# Altium PCB PCB1.PcbDoc
Units mil, origin at the board's own origin, x right, y up, seen from the top; angles counter-clockwise.
Board outline 1181.1 x 1691.13 mil, 2 copper layers (Top Layer, Bottom Layer); 40 components, 56 nets, 197 pads, 47 vias.
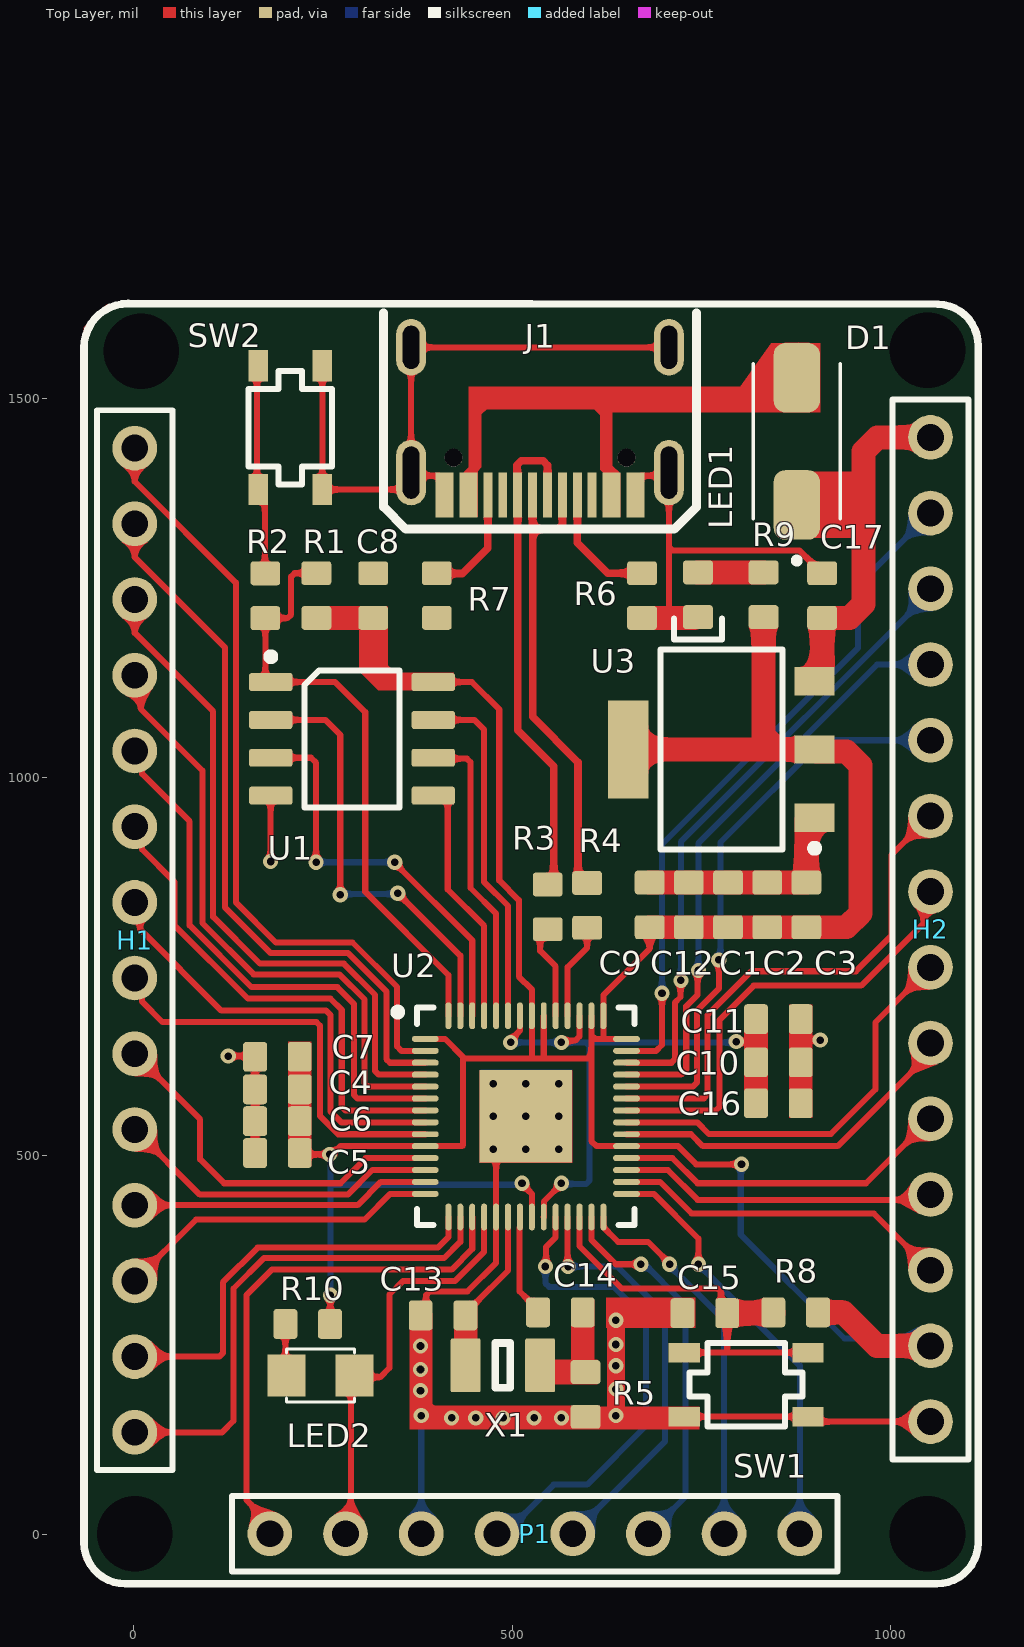
[diagram p0: Top Layer view]
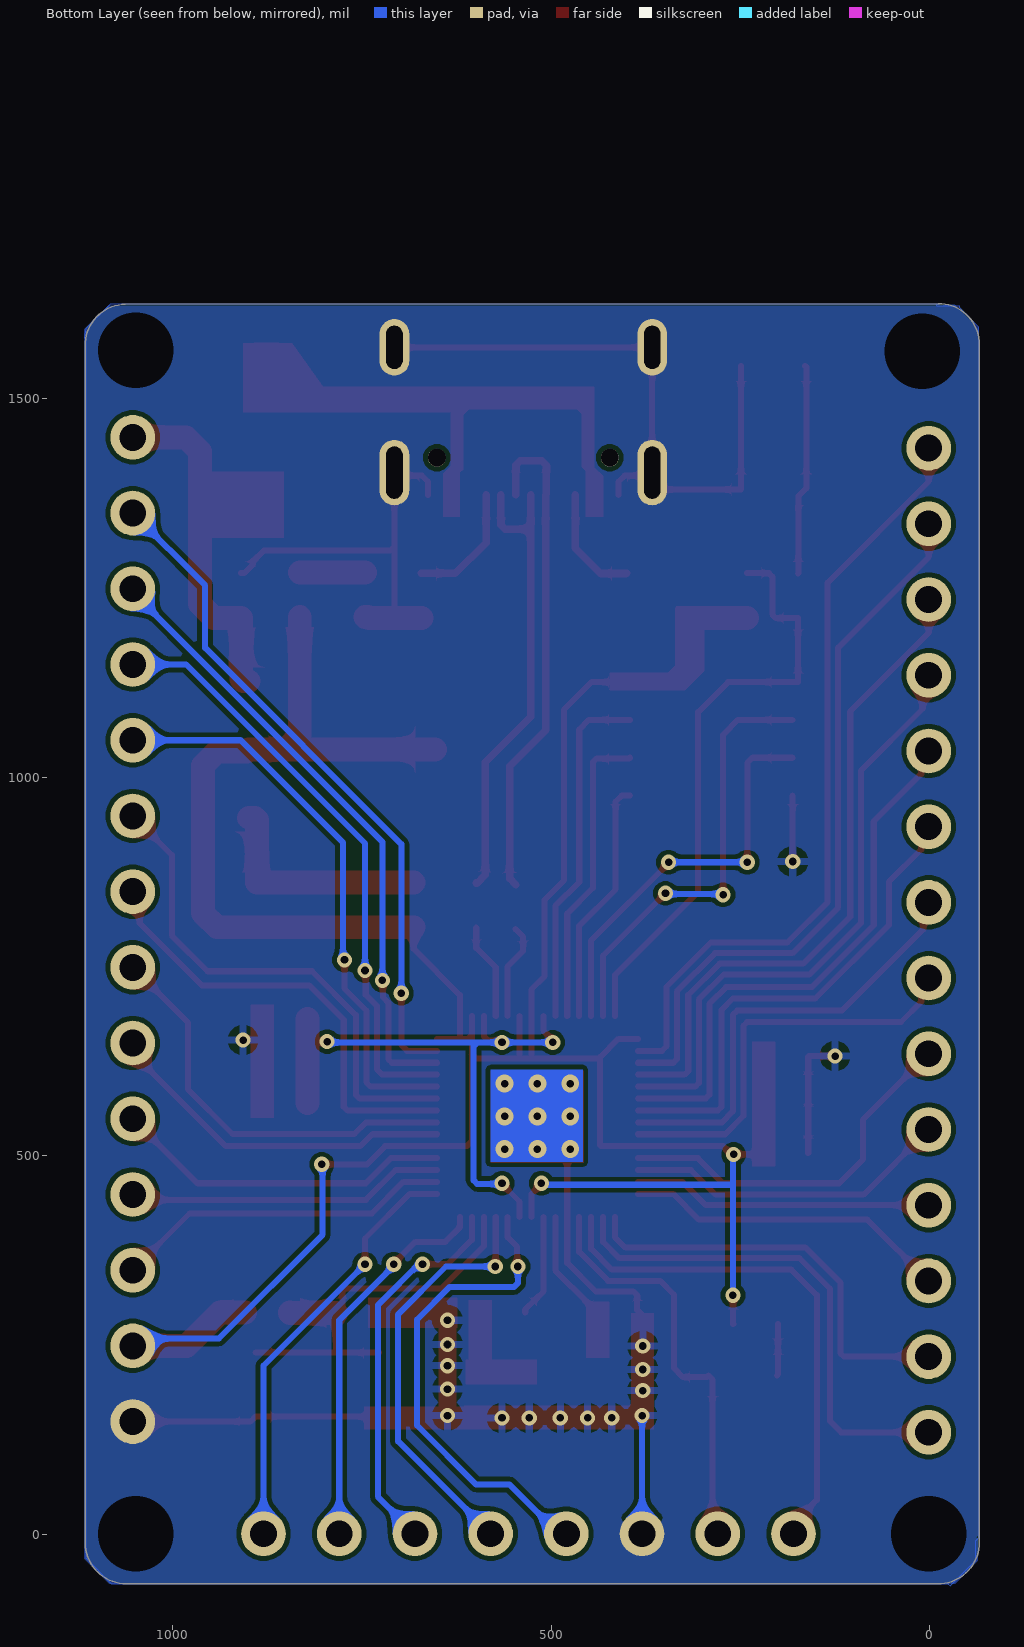
[diagram p1: Bottom Layer view, seen from below]
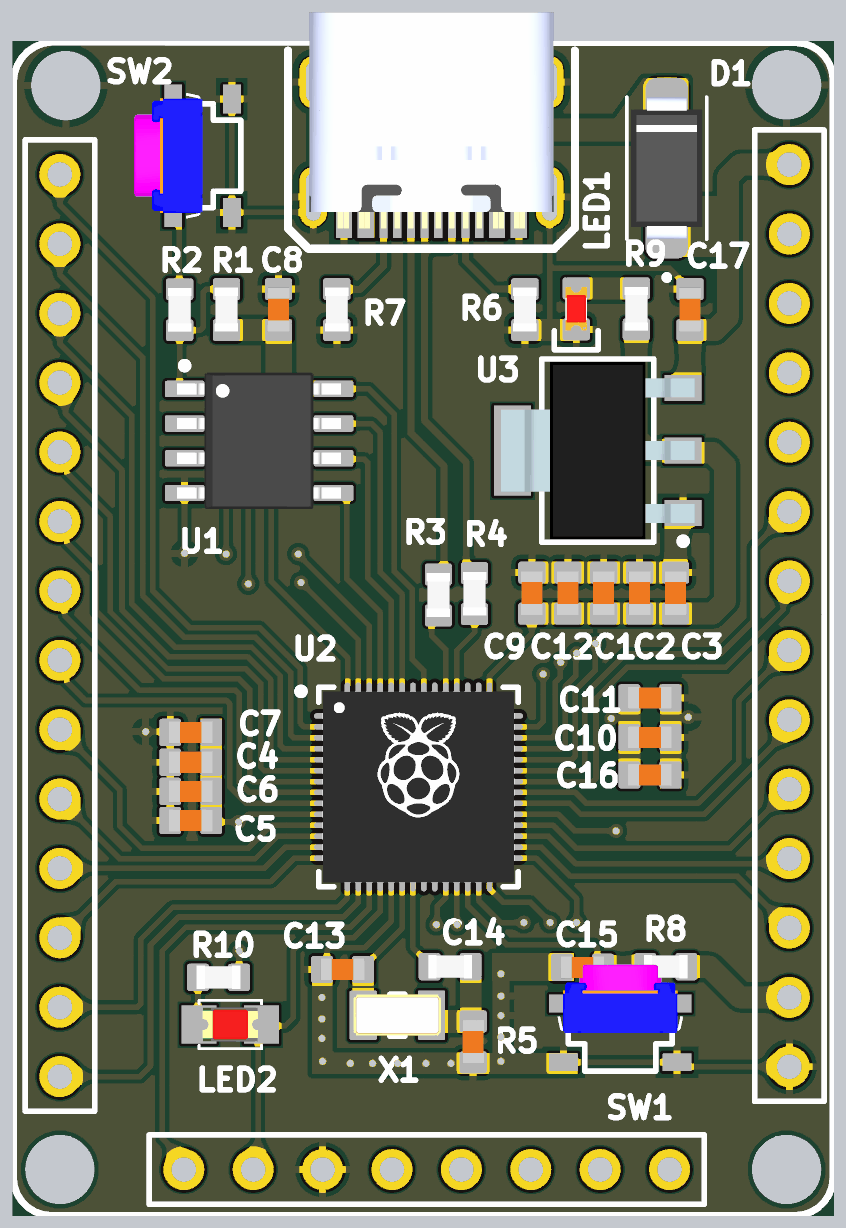
[diagram p2: 3D render of the assembled board from above, using the file's embedded part models]

## Layer stack, top to bottom
Top Solder: solder mask 0.4, Solder Resist, Dk 3.5
Top Layer: signal copper 1.4
Dielectric 1: dielectric 12.6, FR-4, Dk 4.8
Bottom Layer: signal copper 1.4
Bottom Solder: solder mask 0.4, Solder Resist, Dk 3.5

## Board outline
-65.49,-10.5 -65.49,1571.99 cw(c-11.49,1571.99) -11.49,1625.99 1062.52,1624.98 cw(c1061.57,1570.94) 1115.61,1569.99 1115.55,-11.09 cw(c1061.08,-10.67) 1061.07,-65.14 -10.86,-65.14 cw(c-10.86,-10.5)

## Design rules (kind name [scope] priority, off if disabled: settings)
Clearance [All] p1: gap=6 ignorepadtopadclearanceinfootprint=FALSE
DiffPairsRouting USB [InDifferentialPair('No Differential Pair')] p1: maxlimit=10 minlimit=10 mostfreqgap=10 toplayer_minwidth=15 toplayer_maxwidth=15 toplayer_prefwidth=15 bottomlayer_minwidth=15 bottomlayer_maxwidth=15 bottomlayer_prefwidth=15 maxuncoupledlength=500
PolygonConnect PolygonConnect_8 [All vs IsNamedPolygon('GND_L02_P005')] p1: thpad.connectstyle=Direct thpad.reliefconductorwidth=10 thpad.reliefentries=4 thpad.polygonreliefangle="90 Angle" thpad.airgapwidth=10 smdpad.connectstyle=Relief smdpad.reliefconductorwidth=10 smdpad.reliefentries=4 smdpad.polygonreliefangle="90 Angle" smdpad.airgapwidth=10 via.connectstyle=Relief via.reliefconductorwidth=10 via.reliefentries=4 via.polygonreliefangle="90 Angle" via.airgapwidth=10
PolygonConnect PolygonConnect_7 [All vs IsNamedPolygon('GND_L02_P005')] p2: connectstyle=Direct reliefconductorwidth=10 reliefentries=4 polygonreliefangle="90 Angle" airgapwidth=10
PolygonConnect PolygonConnect_6 [All vs IsNamedPolygon('GND_L02_P005')] p3: thpad.connectstyle=Direct thpad.reliefconductorwidth=10 thpad.reliefentries=4 thpad.polygonreliefangle="90 Angle" thpad.airgapwidth=10 smdpad.connectstyle=Direct smdpad.reliefconductorwidth=10 smdpad.reliefentries=4 smdpad.polygonreliefangle="90 Angle" smdpad.airgapwidth=10 via.connectstyle=Relief via.reliefconductorwidth=10 via.reliefentries=4 via.polygonreliefangle="90 Angle" via.airgapwidth=10
PolygonConnect PolygonConnect_5 [All vs IsNamedPolygon('GND_L02_P003')] p4: thpad.connectstyle=Direct thpad.reliefconductorwidth=10 thpad.reliefentries=4 thpad.polygonreliefangle="90 Angle" thpad.airgapwidth=10 smdpad.connectstyle=Direct smdpad.reliefconductorwidth=10 smdpad.reliefentries=4 smdpad.polygonreliefangle="90 Angle" smdpad.airgapwidth=10 via.connectstyle=Relief via.reliefconductorwidth=10 via.reliefentries=4 via.polygonreliefangle="90 Angle" via.airgapwidth=10
PolygonConnect PolygonConnect_4 [All vs IsNamedPolygon('GND_L01_P004')] p5: thpad.connectstyle=Direct thpad.reliefconductorwidth=10 thpad.reliefentries=4 thpad.polygonreliefangle="90 Angle" thpad.airgapwidth=10 smdpad.connectstyle=Direct smdpad.reliefconductorwidth=10 smdpad.reliefentries=4 smdpad.polygonreliefangle="90 Angle" smdpad.airgapwidth=10 via.connectstyle=Relief via.reliefconductorwidth=10 via.reliefentries=4 via.polygonreliefangle="90 Angle" via.airgapwidth=10
PolygonConnect PolygonConnect_3 [All vs IsNamedPolygon('GND_L01_P002')] p6: thpad.connectstyle=Direct thpad.reliefconductorwidth=10 thpad.reliefentries=4 thpad.polygonreliefangle="90 Angle" thpad.airgapwidth=10 smdpad.connectstyle=Direct smdpad.reliefconductorwidth=10 smdpad.reliefentries=4 smdpad.polygonreliefangle="90 Angle" smdpad.airgapwidth=10 via.connectstyle=Relief via.reliefconductorwidth=10 via.reliefentries=4 via.polygonreliefangle="90 Angle" via.airgapwidth=10
PolygonConnect PolygonConnect_2 [All vs IsNamedPolygon('GND_L01_P002')] p7: thpad.connectstyle=Direct thpad.reliefconductorwidth=10 thpad.reliefentries=4 thpad.polygonreliefangle="90 Angle" thpad.airgapwidth=10 smdpad.connectstyle=Direct smdpad.reliefconductorwidth=10 smdpad.reliefentries=4 smdpad.polygonreliefangle="90 Angle" smdpad.airgapwidth=10 via.connectstyle=Relief via.reliefconductorwidth=10 via.reliefentries=4 via.polygonreliefangle="90 Angle" via.airgapwidth=10
PolygonConnect PolygonConnect_1 [All vs IsNamedPolygon('NONET_L01_P000')] p8: thpad.connectstyle=Direct thpad.reliefconductorwidth=10 thpad.reliefentries=4 thpad.polygonreliefangle="90 Angle" thpad.airgapwidth=10 smdpad.connectstyle=Direct smdpad.reliefconductorwidth=10 smdpad.reliefentries=4 smdpad.polygonreliefangle="90 Angle" smdpad.airgapwidth=10 via.connectstyle=Relief via.reliefconductorwidth=10 via.reliefentries=4 via.polygonreliefangle="90 Angle" via.airgapwidth=10
PolygonConnect [All] p9: connectstyle=Relief reliefconductorwidth=10 reliefentries=4 polygonreliefangle="90 Angle" airgapwidth=10
RoutingVias [All] p1: holewidth=28 width=50 viastyle="Through Hole" minholewidth=28 minwidth=50 maxholewidth=28 maxwidth=50
SolderMaskExpansion [All] p1: expansion=4 istentingtop=FALSE
Width [All] p1: maxlimit=39.37 minlimit=8 preferedwidth=8 bottomlayer_maxwidth=10 minimp=50.000000 maximp=50.000000 favimp=50.000000
29 further rules are at their usual default settings.

## Classes and differential pairs
net class USB: USB_D+ USB_D-

## Components (designator, comment, footprint, x,y, rotation, side; value= is the part's Value field where it differs from the comment)
C1 "C0603" CAP_0603 785.14,831.68 r90 top
C2 "C0603" CAP_0603 836.89,831.68 r90 top
C3 "C0603" CAP_0603 888.64,831.68 r90 top
C4 "C0603" CAP_0603 190,588 r180 top
C5 "C0603" CAP_0603 190,504 r180 top
C6 "C0603" CAP_0603 190,546 r180 top
C7 "C0603" CAP_0603 190,631 r180 top
C8 "C0603" CAP_0603 316.51,1240.27 r270 top
C9 "C0603" CAP_0603 851.64,680.74 r0 top
C10 "C0603" CAP_0603 851.64,569.74 r180 top
C11 "C0603" CAP_0603 851.64,623.74 r180 top
C12 "C0603" CAP_0603 681.64,831.68 r90 top
C13 "C0603" CAP_0603 408.79,289.43 r0 top
C14 "C0603" CAP_0603 597,185 r90 top
C15 "C0603" CAP_0603 754.57,292.43 r0 top
C16 "C0603" CAP_0603 909.51,1240.27 r270 top
C17 "C0603" CAP_0603 733.39,831.68 r270 top
D1 "B340A-13" B340A 876,1444 r90 top
H1 "HDR 1X14" "HDR 1X14" 1.44,135.98 r90 top
H2 "HDR 1X14" "HDR 1X14" 1052.62,1448.16 r270 top
J1 "TYPE-C-31-M-12" TYPE-C-31-M-12 536.87,1485.38 r180 top
LED1 "RED" LED_0603_RED 745.54,1241.28 r90 top
LED2 "LED_0805_RED" LED-0805-Red 202,210 r0 top
P1 "Header 8" HDR1X8 880,1 r180 top
R1 "R0603" RES_0603 241.51,1240.27 r90 top
R2 "R0603" RES_0603 174,1240 r90 top
R3 "R0603" RES_0603 547,829 r90 top
R4 "R0603" RES_0603 599,831 r90 top
R5 "R0603" RES_0603 563.79,293.43 r180 top
R6 "R0603" RES_0603 671.51,1240.27 r270 top
R7 "R0603" RES_0603 400.51,1240.27 r270 top
R8 "R0603" RES_0603 874.57,293.43 r0 top
R9 "R0603" RES_0603 832.15,1241.28 r90 top
R10 "R0603" RES_0603 230,278 r0 top
SW1 "SKRPANE010" SKRPANE010 809,198 r0 top
SW2 "SKRPANE010" SKRPANE010 207,1462 r90 top
U1 "W25Q128JVSIM" SOIC-8 288.51,1050.99 r0 top
U2 "RP2040" QFN-56-EP 518.17,552.31 r0 top
U3 "AMS1117" "SOT223 - 3 LEAD" 776.51,1036.99 r180 top
X1 "XTAL_3215" XTAL_3215-2 487.79,223.43 r180 top

## Footprints (in the part's own frame and the unit in brackets; to place one, negate y for a bottom-side part, rotate by r counter-clockwise, add the part's x,y. Pads: shape width x height; smd on the part's side, far side on the other; paste and mask are expansions set on the pad)
B340A [mm]
  rrect50% 2.33x1.55 smd: A(2.135,0) C(-2.135,0)
  silkscreen extent -4.1,-1.46 2.6,1.46, body extent -2.6,-1.3 2.6,1.3, height 2.4
CAP_0603 [mm]
  rrect25% 0.8x1 smd: 1(-0.75,0) 2(0.75,0)
  body extent -0.8,-0.4 0.8,0.4, height 0.51
HDR1X8 [mm] "Connector; Header; 8 Position"
  round 1.5 hole 0.9: 1(0,0) 2(2.54,0) 3(5.08,0) 4(7.62,0) 5(10.16,0) 6(12.7,0) 7(15.24,0) 8(17.78,0)
  silkscreen extent -1.27,-1.27 19.05,1.27
"HDR 1X14" [mm]
  round 1.5 hole 0.9: 1(-0.025,0) 2(2.515,0) 3(5.055,0) 4(7.595,0) 5(10.135,0) 6(12.675,0) 7(15.215,0) 8(17.755,0) 9(20.295,0) 10(22.835,0) 11(25.375,0) 12(27.915,0) 13(30.455,0) 14(32.995,0)
  silkscreen extent -1.3,-1.27 34.26,1.27
LED-0805-Red [mil]
  rect 50x55 smd: 1(0,0) 2(90,0)
  silkscreen extent 0,-35 90,35, body extent 5,-25 85,25, height 43
LED_0603_RED [mm]
  rrect25% 0.8x1 smd: A(0.75,0) K(-0.75,0)
  silkscreen extent -1.5,-0.8 -0.8,0.8, body extent -0.8,-0.4 0.8,0.4, height 0.6
QFN-56-EP [mm]
  oval 0.9x0.2 smd mask+0.15: 1(-3.375,2.6) 2(-3.375,2.2) 3(-3.375,1.8) 4(-3.375,1.4) 5(-3.375,1) 6(-3.375,0.6) 7(-3.375,0.2) 8(-3.375,-0.2) 9(-3.375,-0.6) 10(-3.375,-1) 11(-3.375,-1.4) 12(-3.375,-1.8) 13(-3.375,-2.2) 14(-3.375,-2.6) 29(3.375,-2.6) 30(3.375,-2.2) 31(3.375,-1.8) 32(3.375,-1.4) 33(3.375,-1) 34(3.375,-0.6) 35(3.375,-0.2) 36(3.375,0.2) 37(3.375,0.6) 38(3.375,1) 39(3.375,1.4) 40(3.375,1.8) 41(3.375,2.2) 42(3.375,2.6)
  oval 0.2x0.9 smd mask+0.15: 15(-2.6,-3.375) 16(-2.2,-3.375) 17(-1.8,-3.375) 18(-1.4,-3.375) 19(-1,-3.375) 20(-0.6,-3.375) 21(-0.2,-3.375) 22(0.2,-3.375) 23(0.6,-3.375) 24(1,-3.375) 25(1.4,-3.375) 26(1.8,-3.375) 27(2.2,-3.375) 28(2.6,-3.375) 43(2.6,3.375) 44(2.2,3.375) 45(1.8,3.375) 46(1.4,3.375) 47(1,3.375) 48(0.6,3.375) 49(0.2,3.375) 50(-0.2,3.375) 51(-0.6,3.375) 52(-1,3.375) 53(-1.4,3.375) 54(-1.8,3.375) 55(-2.2,3.375) 56(-2.6,3.375)
  rect 3.1x3.1 smd: 57(0,0)
  silkscreen extent -4.42,-3.65 3.65,3.65, body extent -3.51,-3.51 3.51,3.51, height 1.01
RES_0603 [mm]
  rrect25% 0.8x1 smd: 1(-0.75,0) 2(0.75,0)
  body extent -0.8,-0.43 0.8,0.43, height 0.52
SKRPANE010 [mm]
  rect 1.05x0.65 smd: 12(-2.075,1.075) 12(2.075,1.075) 34(-2.075,-1.075) 34(2.075,-1.075)
  silkscreen extent -1.9,-1.4 1.9,1.4, body extent -2.3,-1.6 2.3,1.6, height 2.51
SOIC-8 [mm] "SOIC, 8-Leads, Body 4.91x3.90mm, Pitch 1.27mm, IPC Medium Density"
  rrect25% 1.45x0.6 smd: 1(-2.725,1.905) 2(-2.725,0.635) 3(-2.725,-0.635) 4(-2.725,-1.905) 5(2.725,-1.905) 6(2.725,-0.635) 7(2.725,0.635) 8(2.725,1.905)
  silkscreen extent -2.85,-2.3 1.6,2.88, body extent -3,-2.5 3,2.5, height 1.75
"SOT223 - 3 LEAD" [mm] "SOT223, 4-Leads, Body 6.7x6.7mm (max), Pitch 2.29mm, IPC Medium Density"
  rect 1.35x0.95 smd: 1(-3.125,2.29) 2(-3.125,0) 3(-3.125,-2.29)
  rect 1.35x3.3 smd: 4(3.125,0)
  silkscreen extent -3.25,-3.35 2.05,3.44, body extent -3.54,-3.25 3.54,3.25, height 1.65
TYPE-C-31-M-12 [mm]
  rect 0.6x1.5 smd mask+0.07: A1B12(-3.2,2.85) B1A12(3.2,2.85)
  rect 0.6x1.5 smd mask+0.14: A4B9(-2.4,2.85) B4A9(2.4,2.85)
  rect 0.3x1.5 smd mask+0.14: A5(-1.25,2.85) A6(-0.25,2.85) A7(0.25,2.85) A8(1.25,2.85) B5(1.75,2.85) B6(0.75,2.85) B7(-0.75,2.85) B8(-1.75,2.85)
  round 0.6 hole 0.6 unplated mask+0.3: MH(-2.9,1.6) MH(2.9,1.6)
  oval 1x1.9 hole 0.55 slot 1.45 at 90 deg mask+0.05: SH(-4.325,-2.1) SH(4.325,-2.1)
  oval 1x2.2 hole 0.55 slot 1.75 at 90 deg mask+0.05: SH(-4.325,2.1) SH(4.325,2.1)
  silkscreen extent -5.25,-3.25 5.25,4, body extent -4.47,-4.65 4.47,3.25, height 3.32
XTAL_3215-2 [mm]
  rrect10% 1x1.8 smd: 1(-1.25,0) 2(1.25,0)
  silkscreen extent -0.25,-0.75 0.25,0.75, body extent -1.6,-0.75 1.6,0.75, height 0.91

## Part data
C1 C2 C3 C4 C5 C6 C7 C8 C9 C10 C11 C12 C13 C14 C15 C16 C17: library part CAP_0603, "Capacitor SMD 0603"
D1: "Diode Schottky 40 V 3A Surface Mount SMA", Package="DO-214 Diodes Inc.", Availability="In Stock", Check_prices=https://www.snapeda.com/parts/B340A-13/Diodes+Inc./view-part/?ref=eda, MF="Diodes Inc.", MP=B340A-13, Price=None, Purchase-URL=https://pricing.snapeda.com/search/part/B340A-13/?ref=eda, SnapEDA_Link=https://www.snapeda.com/parts/B340A-13/Diodes+Inc./view-part/?ref=snap
J1: "USB Type C Connector Horizontal SMT", Manufacturer="Koren Hroparts", Manufacturer Part Number=TYPE-C-31-M-12
LED1: library part LED_0603_RED, "LED 0603 RED SMD"
R1 R2 R3 R4 R5 R6 R7 R8 R9 R10: library part RES_0603, "Resistor SMD 0603"
SW1 SW2: "Tactile Switch SMD SPST", Manufacturer="Alps Alpine", Manufacturer Part Number=SKRPANE010
U1: "128M-BIT / SERIAL FLASH MEMORY WITH / DUAL/QUAD SPI & QPI & DTR SOIC-8", Manufacturer=Winbond, Manufacturer Part Number=W25Q128JVSIM
U2: "32-Bit Dual-Core ARM Cortex-M0+ Microcontroller", Manufacturer="Raspberry Pi", Manufacturer Part Number=RP2040
X1: "Crystal SMD 3215"
P1: LatestRevisionDate=17-Jul-2002, LatestRevisionNote="Re-released for DXP Platform.", Publisher="Altium Limited"

## Free pads (board coordinates)
  round 60 hole 100 unplated: 1(1.44,1.13) 1(10,1563) 1(1048.69,1.13) 1(1048.69,1564.12)

## Via types
v1: diameter 20, hole 10, Top Layer to Bottom Layer, tented both sides, 38 vias
v2: diameter 23.62, hole 9.84, Top Layer to Bottom Layer, 9 vias

## Nets (pads, with @x,y where several pads share a name; then routed paths per layer and width w, separated by ;. In a path a pad name is that pad's centre, name@x,y a point inside that pad or via, vN(x,y) a via of type N, cw(c..) or ccw(c..) an arc to the next point about the centre after c; other vN are vias at no path point)
+1V1: C9.1 C10.2 C11.2 U2.23 U2.45 U2.50 | length 806.6
  Top Layer w8: v1(498,650) 498,653.25 510.24,665.48 510.24,685.12 U2.50 ; U2.23 541.86,419.5 541.86,439.86 v1@565,463 ; v1(565,650) 567.3,652.3 583.3,652.3 588.98,657.98 588.98,685.12 U2.45 ; v1(796,651) 820.87,651 822.11,652.24
  Top Layer w31.5: C10.2 C11.2 822.11,652.24 C9.1
  Bottom Layer w8: v1(498,650) v1(565,650) ; v1@565,463 597.76,463 602.44,467.69 602.44,644.81 597.76,649.49 ; v1@565.52,649.91 794.91,649.91 v1(796,651)
  other v1: 565,463.95
+3V3: C1.1 C2.1 C3.1 C4.1 C5.1 C6.1 C7.1 C8.2 C12.1 C17.2 H2.13 R1.1 R8.2 R9.1 R10.2 U1.8 U2.1 U2.10 U2.22 U2.33 U2.42 U2.43 U2.44 U2.48 U2.49 U3.2 U3.4 | length 3954.7
  Top Layer w8: C5.1 221.53,502 v1(259,502) 262.25,502 273.18,512.94 U2.10 433.94,512.94 435.33,514.33 435.33,629.67 ; R10.2 259.76,278.24 259.76,315.76 v1(260,316) ; U2.1 411.33,654.67 435.33,630.67 435.33,629.67 ; U1.8 447.01,1125.99 483,1090 483,864 509,838 509,737 526.05,719.95 U2.49 526.05,630 ; v1@513.5,462.5 526.05,449.95 U2.22 ; 541.8,630 U2.48 ; U2.44 604.79,659.43 ; U2.42 621,654.67 ; C12.1 681.64,773.64 620.54,712.54 U2.43 620.54,655.13 621,654.67 ; v1(803,489) 743.23,489 719.29,512.94 U2.33 611.54,512.94 604.79,519.69 604.79,633.69 ; 435.33,629.67 436,629 600.1,629 604.79,633.69 ; 604.79,633.69 604.79,659.43 ; 604.79,659.43 609.55,654.67 621,654.67
  Top Layer w31.5: R1.1 C8.2 ; U3.4 850.6,1036.99 ; C12.1 C17.2 C1.1 C2.1 C3.1 941.55,802.15 960,820.6 960,1015.59 941.55,1034.04 902.5,1034.04 U3.2 850.6,1036.99 ; R9.1 832.15,1055.44 850.6,1036.99 ; R8.2 937.57,293.43 981.84,249.16 H2.13
  Bottom Layer w8: v1(259,502) 260,501 260,462.05 ; v1(260,316) 260,462.05 ; v1(513.05,463.95) 511.09,462 260.05,462 260,462.05 ; v1(803,489) 802,488 802,396 939.07,258.93 1042.85,258.93 H2.13
ADC0: H2.5 U2.38 | length 758.6
  Top Layer w8: U2.38 738.68,591.68 744,597 744,692 773,721 v1(773,759)
  Bottom Layer w8: v1(773,759) 775.29,761.29 775.29,914.29 910.16,1049.16 H2.5
ADC1: H2.4 U2.39 | length 791.7
  Top Layer w8: U2.39 723.31,607.43 730,614.11 730,697.8 745,712.8 745,744 v1(746,745)
  Bottom Layer w8: v1(746,745) 746,913 982.16,1149.16 H2.4
ADC2: H2.3 U2.40 | length 827
  Top Layer w8: U2.40 710.31,623.17 715.05,627.91 715.05,702.64 722.4,710 722.4,731.4 v1(723,732)
  Bottom Layer w8: v1(723,732) 723,915 1052.62,1244.62 H2.3
ADC3: H2.2 U2.41 | length 899.6
  Top Layer w8: U2.41 690.31,638.92 698,646.61 v1(698,715)
  Bottom Layer w8: v1(698,715) 698,912 957.13,1171.13 957.13,1253.67 H2.2
GND: C1.2 C2.2 C3.2 C4.2 C5.2 C6.2 C7.2 C8.1 C9.2 C10.1 C11.1 C12.2 C13.1 C14.1 C15.1 C16.1 C17.1 H2.14 J1.A1B12 J1.B1A12 J1.SH LED1.K P1.6 pad.1 R6.2 R7.2 SW1.34 SW2.34 U1.4 U2.19 U2.57 U3.1 | length 2770.9
  Top Layer w8: v1(125,632) 159.47,632 C7.2 C4.2 C6.2 C5.2 ; v1(181,889) 181,975.76 U1.4 ; SW2.34@249.32,1543.69 249.32,1380.31 352.11,1380.31 366.6,1394.8 J1.SH@366.6,1402.7 ; C13.1 386.47,296.63 386.47,316.31 391.15,321 441,321 478.8,358.8 U2.19 478.8,505.06 v2(474.87,509) ; J1.B1A12 410.89,1390.89 403.08,1398.7 370.6,1398.7 J1.SH@366.6,1402.7 ; J1.A1B12 662.86,1390.89 670.67,1398.7 703.15,1398.7 707.15,1402.7 707.15,1398.7 707.15,1304.69 ; J1.SH@707.15,1568.06 366.6,1568.06 J1.SH@366.6,1402.7 ; 709,1210.74 707.15,1212.59 707.15,1304.69 ; SW1.34@727.31,155.68 890.69,155.68 897.21,149.16 H2.14 ; 884,654 v1@907,654 ; C16.1 905.57,1269.8 893.83,1281.54 893.83,1285.48 879.31,1300 711.84,1300 707.15,1304.69
  Top Layer w31.5: R6.2 709,1210.74 740.58,1210.74 741.6,1211.76 LED1.K ; C12.2 C17.1 C1.2 C2.2 C3.2 888.64,943.8 891.67,946.83 U3.1
  Bottom Layer w8: P1.6 v1(380,157)
  other v1: 420,154 452,154 488,154 529,154 565,154 637,157 379,190 637,192 379,218 637,223 379,249 637,251 637,283 907,653
  other v2: 518.17,509 561.48,509 474.87,552.31 518.17,552.31 561.48,552.31 474.87,595.61 518.17,595.61 561.48,595.61
IO0: H1.14 U2.2 | length 1032.9
  Top Layer w8: H1.14 1.44,1390.88 135,1257.33 135,835 188,782 289.2,782 348,723.2 348,644.61 353.69,638.92 U2.2
IO1: H1.13 U2.3 | length 958.1
  Top Layer w8: H1.13 1.44,1290.88 121,1171.33 121,828 181,768 283.4,768 334,717.4 334,627.86 338.69,623.17 U2.3
IO2: H1.12 U2.4 | length 887.4
  Top Layer w8: H1.12 1.44,1190.88 105,1087.33 105,816 167,754 277.6,754 319,712.6 319,612.11 323.69,607.43 U2.4
IO3: H1.11 U2.5 | length 812.9
  Top Layer w8: H1.11 9.59,1126.83 9.59,1090.41 91,1009 91,807.6 158.6,740 271.8,740 305,706.8 305,596.36 309.69,591.68 U2.5
IO4: H1.10 U2.6 | length 736.9
  Top Layer w8: H1.10 11.21,1025.22 11.21,1004.79 74,942 74,804.8 155.8,723 269,723 291,701 291,580.62 295.69,575.93 U2.6
IO5: H1.9 U2.7 | length 659.5
  Top Layer w8: H1.9 11.21,925.22 11.21,904.79 54,862 54,805 151,708 260,708 275,693 275,564.87 279.69,560.18 U2.7
IO6: H1.8 U2.8 | length 595.6
  Top Layer w8: H1.8 8.59,827.83 8.59,799.41 116,692 254.31,692 260,686.31 260,558.8 274.37,544.43 U2.8
IO7: H1.7 U2.9 | length 551.8
  Top Layer w8: H1.7 11.21,725.22 11.21,703.79 38,677 241.31,677 246,672.31 246,553 270.32,528.69 U2.9
IO8: H1.6 U2.11 | length 499.4
  Top Layer w8: H1.6 88,548.42 88,495.57 119.57,464 273.28,464 306.47,497.19 U2.11
IO9: H1.5 U2.12 | length 432.9
  Top Layer w8: H1.5 87.44,448.98 282.98,448.98 315.44,481.44 U2.12
IO10: H1.4 U2.13 | length 396.6
  Top Layer w8: H1.4 295.98,434.98 326.69,465.69 U2.13
IO11: H1.3 U2.14 | length 431.5
  Top Layer w8: H1.3 82.46,416 305,416 338.94,449.94 U2.14
IO12: H1.2 U2.15 | length 561
  Top Layer w8: H1.2 113.31,234.98 118,239.67 118,333 164,379 402,379 415.81,392.81 U2.15
IO13: H1.1 U2.16 | length 669.7
  Top Layer w8: H1.1 116.98,134.98 132,150 132,325 172,365 410,365 431.56,386.56 U2.16
IO14: P1.8 U2.17 | length 693.9
  Top Layer w8: P1.8 180,14.82 149,45.82 149,316.31 182.69,350 420,350 447.31,377.31 U2.17
IO15: LED2.2 P1.7 U2.18 | length 557.3
  Top Layer w8: P1.7 287,8 287,205 LED2.2 294,208 326,208 338,220 338,317 356,335 424.8,335 463.06,373.26 U2.18
IO16: P1.3 U2.27 | length 514.5
  Top Layer w8: U2.27 604.79,389.21 637,357 v1(670,357)
  Bottom Layer w8: v1@670,362 729,303 729,50 P1.3
IO17: P1.2 U2.28 | length 501.9
  Top Layer w8: U2.28 620.54,405.78 639.81,386.51 679.49,386.51 v1@704.57,361.43
  Bottom Layer w8: v1(708,357) 708,355 780,283 P1.2
IO18: P1.1 U2.29 | length 556.9
  Top Layer w8: U2.29 687.06,449.94 746,391 v1@746,365
  Bottom Layer w8: v1(746,357) 880,223 P1.1
IO19: H2.12 U2.30 | length 449.8
  Top Layer w8: U2.30 695.31,465.69 737,424 977.78,424 H2.12
IO20: H2.11 U2.31 | length 420.9
  Top Layer w8: U2.31 705.56,481.44 745,442 1045.46,442 H2.11
IO21: H2.10 U2.32 | length 450.6
  Top Layer w8: U2.32 711.81,497.19 745,464 967.46,464 H2.10
IO22: H2.9 U2.34 | length 472.4
  Top Layer w8: U2.34 736.31,528.69 752,513 930,513 1052.62,635.62 H2.9
IO23: H2.8 U2.35 | length 551
  Top Layer w8: U2.35 744.57,544.43 760,529 921,529 980,588 980,676.54 H2.8
IO24: H2.7 U2.36 | length 607.7
  Top Layer w8: U2.36 769.31,560.18 774,564.87 774,679.9 819.1,725 961,725 1043.63,807.63 1043.63,840.17 H2.7
IO25: H2.6 U2.37 | length 680.3
  Top Layer w8: U2.37 753.31,575.93 758,580.62 758,686 816,744 954,744 1001,791 1001,897.54 H2.6
NetC14_2: C14.2 R5.1 X1.1
NetJ1_A5: J1.A5 R6.1 | length 165.1
  Top Layer w10: J1.A5 586.09,1310.18 626.47,1269.8 R6.1
NetJ1_B5: J1.B5 R7.1 | length 151.8
  Top Layer w10: R7.1 400.95,1269.36 434.36,1269.36 467.98,1302.98 J1.B5
NetLED1_A: LED1.A R9.2 | length 86.6
  Top Layer w31.5: LED1.A R9.2
NetLED2_1: LED2.1 R10.1 | length 68.6
  Top Layer w8: R10.1 200.47,211.53 LED2.1
NetR2_2: R2.2 SW2.12 | length 279.4
  Top Layer w8: SW2.12@164.68,1543.69 163,1542.02 163,1381.98 173.47,1371.51 173.47,1270.06 R2.2
NetR3_1: R3.1 U2.47 | length 126.9
  Top Layer w8: R3.1 537,789.47 537,771 557.54,750.46 U2.47
NetR4_1: R4.1 U2.46 | length 126.9
  Top Layer w8: U2.46 573.29,749.29 599,775 R4.1
RUN: C15.2 R8.1 SW1.12 U2.26 | length 559.2
  Top Layer w8: U2.26 589.04,380.96 645,325 771.21,325 775.89,320.31 775.89,300.63 C15.2 784.1,240.43 784,240.32 ; SW1.12@727.31,240.32 784,240.32 ; SW1.12@890.69,240.32 784,240.32
  Top Layer w31.5: C15.2 845.05,292.43 R8.1
SPI_SCLK: U1.6 U2.52 | length 400.5
  Top Layer w8: U1.6 397.04,1024.75 440.31,1024.75 445,1020.06 445,854 478.8,820.2 U2.52
SPI_SD0: U1.5 U2.53 | length 325.3
  Top Layer w8: U1.5 407.11,975.99 414.92,968.18 414.92,956.87 415,956.79 415,852 463.06,803.94 U2.53
SPI_SD1: U1.2 U2.55 | length 584.1
  Top Layer w8: U1.2 253.35,1075.99 273,1056.34 v1(273,845) ; v1(349,847) 431.56,764.44 U2.55
  Bottom Layer w8: v1(273,845) 274,846 348,846 v1(349,847)
SPI_SD2: U1.3 U2.54 | length 543
  Top Layer w8: U1.3 234.31,1025.99 241,1019.31 v1(241,888) ; v1(345,888) 345,887 447.31,784.69 U2.54
  Bottom Layer w8: v1(241,888) v1(345,888)
SPI_SD3: U1.7 U2.51 | length 463.6
  Top Layer w8: U1.7 450.2,1075.99 463,1063.19 463,861.8 494.55,830.25 U2.51
SPI_SS: R1.2 R2.1 U1.1 U2.56 | length 801
  Top Layer w8: R1.2 212.69,1269.8 208,1265.11 208,1215.16 203.31,1210.47 R2.1 174,1125.99 U1.1 266.34,1125.99 306,1086.33 306,849 416,739 416,699.02 415.81,698.83 U2.56
SWCLK: P1.5 U2.24 | length 642.2
  Top Layer w8: v1(544,354) 545,355 545,380 557.54,392.54 U2.24
  Bottom Layer w8: P1.5 490,1 555,66 599,66 677,144 677,284 634,327 549,327 544,332 v1(544,354)
SWDIO: P1.4 U2.25 | length 560.5
  Top Layer w8: U2.25 573.29,354.71 v1(574,354)
  Bottom Layer w8: v1(574,354) 639,354 702.22,290.78 702.22,123.22 P1.4
USB_D+: J1.A6 J1.B6 R3.2 | length 662
  Top Layer w10: J1.A6 546.72,1412.59 540.86,1418.45 512.3,1418.45 506.44,1412.59 506.44,1374.08 J1.B6 507.35,1062.15 555,1014.5 555,866.53 R3.2
USB_D-: J1.A7 J1.B7 R4.2 | length 624.4
  Top Layer w10: J1.A7 527.03,1327.9 ; J1.B7 566.4,1333.76 560.54,1327.9 527.03,1327.9 ; R4.2 597.75,860.53 587,871.28 587,1020 527.03,1079.97 527.03,1327.9
VBUS: D1.A J1.A4B9 J1.B4A9
VSYS: C16.2 D1.C H2.1 U3.3 | length 451.7
  Top Layer w31.5: U3.3 906.56,1127.15 909.51,1130.1 C16.2 945.55,1210.74 964,1229.19 964,1430.71 982.45,1449.16 H2.1
XIN: C13.2 U2.20 X1.2 | length 153.3
  Top Layer w8: C13.2 438.32,292.31 450,304 494.55,348.55 U2.20
XOUT: R5.2 U2.21 | length 136.5
  Top Layer w8: U2.21 510.3,405.78 510.01,405.49 510.01,320.99 521.89,309.11 522.51,309.11 534.26,297.36 R5.2
pads on no net: J1.A8 J1.B8 J1.MH

## Polygon pours and split planes (outlines as drawn)
GND on Top Layer "NONET_L01_P004" (solid, shelved, pour order 4): -18.37,1624.2 -18.17,1624 1084.23,1624 1116.51,1591.72 1115,1590.21 1115,-33.29 1083.51,-64.78 1069.51,-64.78 1066.29,-68 -27,-68 -61,-34 -65,-34 -65,1531 -63,1533 -65,1535 -65,1594.77 -35.57,1624.2 -20.89,1624.2
GND on Bottom Layer "NONET_L02_P005" (solid, shelved, pour order 5): -12.43,1625.21 1082.29,1625.21 1100.04,1607.47 1100.77,1607.47 1115,1592.5 1116.51,1580.77 1115,1579.26 1115,-31 1081.22,-64.78 -23.78,-64.78 -27,-68 -61,-34 -61,-8.27 -65,-4.27 -65,1594.77 -39.43,1620.35 -39.43,1622.64 -10.06,1622.64 -8.5,1624.2
GND on Bottom Layer "GND_L02_P003" (solid, pour order 3): -18.37,1624.2 -17.38,1623.21 1085.02,1623.21 1116.51,1591.72 1116.51,1569.83 1117.13,1569.21 1116.51,1568.6 1116.51,-31.78 1083.51,-64.78 1055.51,-64.78 1054.51,-63.78 1053.51,-64.78 -33.49,-64.78 -63.49,-34.78 -63.49,-5.78 -61.49,-3.78 -63.49,-1.78 -63.49,1593.99 -33.28,1624.2 -8.5,1624.2 -6.49,1626.22

## Other copper
Top Layer:
  rectangle net GND: 457,491 580,613
  rectangle net VSYS: 853,1316 979,1404
  rectangle net GND: 624,273 742,313
  rectangle net +3V3: 204,486 235,651
  rectangle net GND: 866,550 897,700
  rectangle net GND: 625,141 649,313
  rectangle net GND: 579,139 747.5,169
  rectangle net NetC14_2: 578,214.53 609,310
  rectangle net NetC14_2: 519,198 613,231
  rectangle net XIN: 423,233 454,308
  region net GND: 364.5,293 364.5,139 613.5,139 615.5,141 615.5,170 579.5,170 575,170 571.5,170 397.5,170 394.5,173 394.5,292 365.5,292
  region net +3V3: 336,1224 336,1148 346,1138 423,1138 423,1117 424,1116 423,1115 323,1115 298,1140 298,1226 335,1226
  region net VBUS: 907,1573.67 877.84,1574.92 842,1573.67 801,1516 616.5,1516 616.5,1482.56 907,1482.56
  region net VBUS: 642.5,1345.5 642.5,1401.5 632.5,1411.5 632.5,1506.15 621.56,1516 443,1516 443,1410 431.5,1398.5 431.5,1344.5 454.5,1344.5 454.5,1404.5 459.5,1409.5 459.5,1479.5 466.5,1486.5 608.5,1486.5 616.5,1478.5 616.5,1406.5 620.5,1402.5 620.5,1344.5 642.5,1344.5
  pour cut-out: 486,1935 486,1945 486,1936
Bottom Layer:
  rectangle net GND: 458,492 580,614

## Silkscreen, mask and mechanical layers (free items; w line width, h text height)
Top Overlay:
  lines w10: 1115.53,-11.09 cw(c1061.07,-10.68) 1061.07,-65.14 -10.86,-65.14 cw(c-10.86,-10.5) -65.49,-10.5 -65.49,657.46 -65.49,1567.5 cw(c-7,1567.5) -7,1625.99 1062.52,1624.98 cw(c1061.57,1570.94) 1115.61,1569.99 1115.55,-11.09

## Text inside footprints (layer, text, board x,y; h text height)
LED1: Mechanical 13 "+" at 721.58,1293.13 h31.5 r90